# Altium PCB 388D_Control_v1_PCB1_jiin.PcbDoc (part 3 of 3)
Units mil, origin at the board's own origin, x right, y up, seen from the top; angles counter-clockwise.
Board outline 4500 x 3200 mil, 6 copper layers (Top Layer, Singal Layer 2, Signal layer 3, Signal Layer 4, Signal Layer 5, Bottom Layer), stack 32.7 mil thick; 386 components, 377 nets, 1672 pads, 15 vias.
Unrouted connection lines stored in the file: 1151.
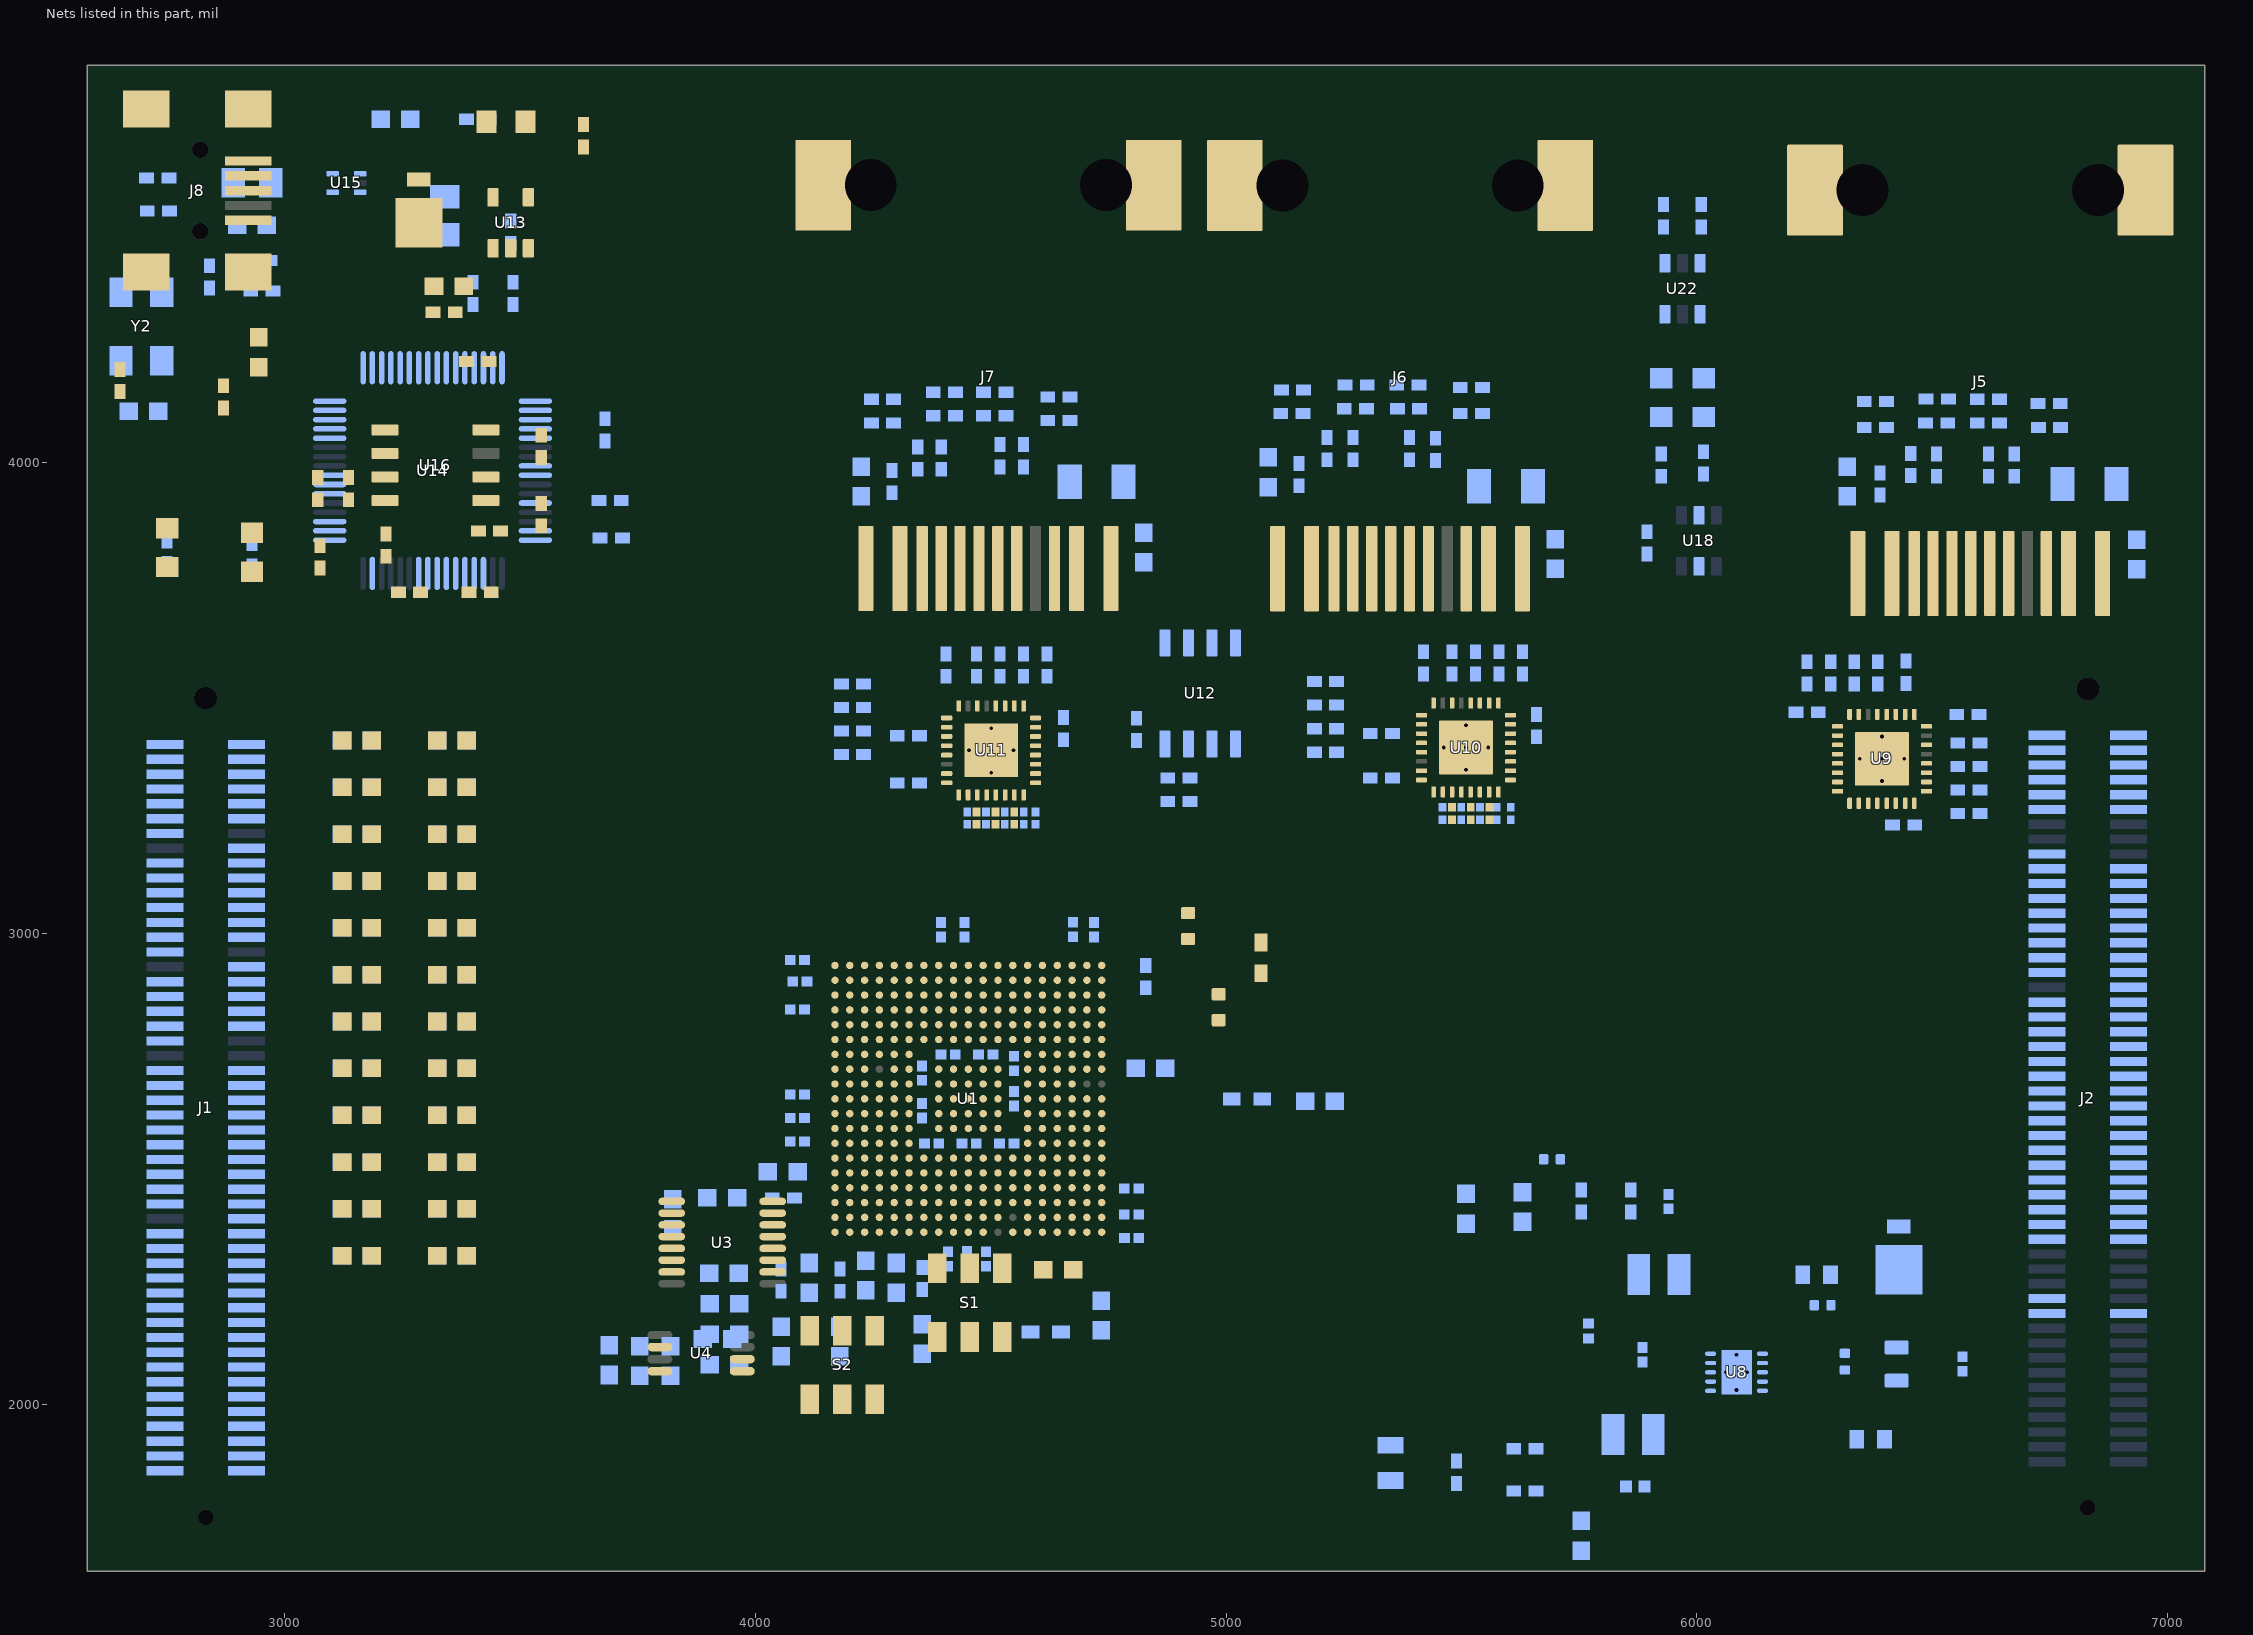
[diagram p2: the nets of this part, all layers, seen from the top]

## Part data (continued)
R154: library part CMP-0026834-3, "RES, 12 k, 5%, 0.063 W, AEC-Q200 Grade 0, 0402", Manufacturer=Vishay-Dale, Power_W=63mW, Supplier Part Number 1=541-12KJCT-ND, TempCo="200 ppm/C", Tolerance_%=5%, Value2=0.063W, Value_Code=12k0, ValueDisplayed=12k, AEC Category=Q200, AEC Grade=0, AEC Qualified=Y, ComponentLink1Description="Datasheet link", ComponentLink1URL=http://www.vishay.com/docs/20035/dcrcwe3.pdf, CompType=Resistor, EIA_Code=E24, MountType=SMT, PackageReference=0402, PartNumber=CRCW040212K0JNED, Res_ohm=12k, RoHS=E, SizeArea_mm2=0.5, SizeX_mm=1, SizeY_mm=0.5, SizeZ_mm=0.6, Supplier 1=Digi-Key, Supplier 2=Newark, Supplier 3=Mouser, Supplier Part Number 2=89M6603, Supplier Part Number 3=71-CRCW040212K0JNED, Technology="Thick Film", Value1=5%, VDC_V=50V
S1 S2: library part CMP-0002233-1, "Switch, Dual SPDT,  2 Pos, 0.1A, 6VDC, SMD", CurrentRating_mA=100A, Manufacturer="Copal Electronics", Supplier Part Number 1=CASD20JCT-ND, Circuit=SPDT, ComponentLink1Description="Datasheet Link", ComponentLink1URL=http://www.nidec-copal-electronics.com/e/catalog/switch/cas.pdf, CompType=Switch, LatestRevisionDate=2017-03-09, MountType=SMT, Orientation="Top Actuated", PackageReference=5.4x3.9mm, PartNumber=CAS-D20TA, PositionCount=2, Publisher="Texas Instruments", RoHS=Y, Supplier 1=Digi-Key, SwitchFunction=On-On, VDC_V=6V
S3: library part CMP-0002193-2, "Switch, SPST-NO, Off-Mom, 12 V, SMD", CurrentRating_mA=50A, Manufacturer="Omron Electronic Components", Supplier Part Number 1=SW1021CT-ND, Circuit=SPST-NO, ComponentLink1Description="Datasheet URL", ComponentLink1URL=http://www.omron.com/ecb/products/pdf/en-b3u.pdf, CompType=Switch, LatestRevisionDate=2017-03-09, MountType=SMT, Orientation="Top Actuated", PackageReference="SMD, 3-Leads, Body 3x2.5mm", PartNumber=B3U-1100P, PositionCount=1, Publisher="Texas Instruments", RoHS=Y, Supplier 1=Digi-Key, Supplier 2=Newark, Supplier 3=Mouser, Supplier Part Number 2=39M4619, Supplier Part Number 3=653-B3U-1100P, SwitchFunction=Off-Mom, VDC_V=12V
S4 S5: library part CMP-0002230-1, "Switch, SPST, 2 Pos, 25mA, 24VDC, SMD", CurrentRating_mA=25A, Manufacturer="CTS Electrocomponents", Supplier Part Number 1=CT2182LPST-ND, Circuit=SPST, ComponentLink1Description="Datasheet Link", ComponentLink1URL=http://www.ctscorp.com/components/Datasheets/218.pdf, CompType=Switch, LatestRevisionDate=2017-03-09, MountType=SMT, Orientation="Top Actuated", PackageReference=3.71x5.8mm, PartNumber=218-2LPST, PositionCount=2, Publisher="Texas Instruments", RoHS=Y, Supplier 1=Digi-Key, Supplier 2=Mouser, Supplier Part Number 2=774-2182LPST, SwitchFunction=Off-On, VDC_V=24V
TP1 TP2 TP3 TP4: library part CMP-002-00037-2, "Test Point, Orange, Height 4.6 mm, Tail Length 3 mm, 1-Pin THD, RoHS", Colour=Orange, Manufacturer=Keystone, Package Description="1-Pin Through Hole Device, Dia 2.54 mm", Package Quantity=10, Case/Package=5003, Connector Type=TestPoint, Contact Material=Bronze, Contact Plating=Tin, Datasheet URL=http://keyelco.com/userAssets/file/M65p56.pdf, Datasheet Version=Jun-15, Diameter=2.54mm, Manufacturer URL=http://www.keyelco.com/, Mounting Technology=TH, Package Reference=5003, Packaging=Bulk, Pins=1, RoHS Compliant=True
TP5 TP6 TP7 TP8 TP9 TP10 TP11 TP12 TP13: library part CMP-0078143-3, "TEST POINT.  No entry in BOM.", Manufacturer=N/A, CompType=Testpoint, PackageReference=N/A, PartNumber=N/A
U1: library part CMP-012-000147-1, "TMS320F28388DZWTS, ZWT0337A (NFBGA-337)", Alternate Manufacturer="Texas Instruments", AEC Category=Q200, AEC Qualified=N, Available Preview Images=2D, ComponentLink1Description="Datasheet Link", ComponentLink1URL=http://www.ti.com/lit/ds/symlink/tms320f28388d.pdf, ComponentLink2Description="Product Folder", ComponentLink2URL=http://www.ti.com/product/tms320f28388d, ComponentLink3Description="Online Datasheet", ComponentLink3URL=http://www.ti.com/product/tms320f28388d/datasheet, CompType=IC, Design Item ID=TMS320F28388DZWTS, Manufacturer="Texas Instruments", MountType=SMT, PackageDescription=NFBGA-337, PackageReference=ZWT0337A, PartNumber=TMS320F28388DZWTS, SizeArea_mm2=256, SizeAreaWB_mm2=324, SizeX_mm=16, SizeY_mm=16, SizeZ_mm=1.4, Source=SamacSys.SchLib
U2: library part CMP-0051789-2, "Dual Buffer/Driver with Open-Drain Output, DBV0006A, LARGE T&R", F @ Nom Voltage(Max)(Mhz)=150, Generic Part Number=SN74LVC2G07, ICC @ Nom Voltage(Max)(mA)=0.01, Manufacturer="Texas Instruments", Operating Temperature Range(C)="-40 to 125", Rating=Catalog, tpd @ Nom Voltage(Max)(ns)=8.6,4.4,3.7,2.9, Voltage(Nom)(V)=1.8,2.5,3.3,5, 3-State Output=No, AEC Category=Q200, AEC Qualified=N, Bits(#)=2, ComponentLink1Description="Datasheet Link", ComponentLink1URL=http://www.ti.com/lit/ds/symlink/sn74lvc2g07.pdf, ComponentLink2Description="Product Folder", ComponentLink2URL=http://www.ti.com/product/sn74lvc2g07, ComponentLink3Description="Online Datasheet", ComponentLink3URL=http://www.ti.com/product/sn74lvc2g07/datasheet, CompType=IC, DatasheetVersion=SCES308K, Green_EU RoHS=Passed, Green_EU RoHS-2=Passed, Green_Lifecycle=Active, Green_REACh=Passed, Input Type=CMOS/TTL, Logic=True, MountType=SMT, Output Drive (IOL/IOH)(Max)(mA)=32/-32, Output Type=CMOS, PackageDescription=SOT-23-6, PackageReference=DBV0006A, PartNumber=SN74LVC2G07DBVR, RoHS=Y, Schmitt Trigger=No, SizeArea_mm2=8.12, SizeAreaWB_mm2=14.82, SizeX_mm=2.8, SizeY_mm=2.9, SizeZ_mm=1.45, Sub-Family="Inverting Buffer/Driver", Technology Family=LVC, VCC(Max)(V)=5.5, VCC(Min)(V)=1.65
U3: library part CMP-014-00004-2, "High-Speed, Single-Supply, Rail-to-Rail Operational Amplifier MicroAmplifier(TM) Series, 2.7 to 5.5 V, -55 to 150 degC, 16-pin SOP (DBQ16), Green (RoHS & no Sb/Br)", Case/Package="16-Pin, Plastic Small Outline, Body 3.9 x 4.9 mm, Pitch 0.635 mm", Manufacturer="Texas Instruments", Total Supply Voltage(Max)(+5V is 5, +/-5V is 10)=5.5, Total Supply Voltage(Min)(+5V is 5, +/-5V is 10)=2.7, Available Preview Images=2D, CMRR(Min)(dB)=66, Code_JEDEC=MO-137, ComponentLink1Description="Manufacturer URL", ComponentLink1URL=http://www.ti.com/, ComponentLink2Description=Datasheet, ComponentLink2URL=http://www.ti.com/general/docs/lit/getliterature.tsp?genericPartNumber=OPA4350&fileType=pdf, ComponentLink3Description="Package Specification", ComponentLink3URL=http://www.ti.com/litv/pdf/msoi004g, DatasheetVersion=SBOS099C, Design Item ID=CMP-0041147-1, Eco-Plan="Green (RoHS & no Sb/Br)", IIB(Max)(pA)=10, Iq per channel(Max)(mA)=7.5, Mounting Technology="Surface Mount", Number of Channels=4, Offset Drift(Typ)(uV/C)=4, PackageReference=DBQ0016A, PackageVersion="4073301-2/H, 10/2008", Slew Rate(Typ)(V/us)=22, Source=SamacSys.SchLib, Sub Family="Low Input Bias Current Amp (<=10pA), Low Offset Voltage Amplifier (<=500uV), Low Supply Voltage Amplifier (<=2.7V), Precision Amplifier", Vio (25C)(Max)(mV)=0.5, Vn at 1kHz(Typ)(nV/rtHz)=18
U4: library part CMP-0032596-2, "Low Noise, Very Low Drift, Precision Series Voltage Reference, DGK0008A (VSSOP-8)", Manufacturer="Texas Instruments", Rating=Catalog, Temp Coeff(Max)(ppm/ degree C)=3, AEC Category=Q200, AEC Qualified=N, Code_JEDEC=MO-187-AA, ComponentLink1Description="Datasheet Link", ComponentLink1URL=http://www.ti.com/lit/ds/symlink/ref5030.pdf, ComponentLink2Description="Product Folder", ComponentLink2URL=http://www.ti.com/product/ref5030, ComponentLink3Description="Online Datasheet", ComponentLink3URL=http://www.ti.com/product/ref5030/datasheet, CompType=IC, DatasheetVersion=SBOS410E, Eco-Plan="Green (RoHS & no Sb/Br)", Initial Accuracy @ 25/deg C(%)=0.05, Iout/Iz(Max)(mA)=10, Iq(Max)(uA)=1000, MountType=SMT, PackageDescription=VSSOP-8, PackageReference=DGK0008A, PackageVersion=4073329/E, PartNumber=REF5030IDGKT, RoHS=Y, SizeArea_mm2=14.7, SizeAreaWB_mm2=23.6, SizeX_mm=4.9, SizeY_mm=3, SizeZ_mm=1.1, SubFamily="Series Voltage Reference", VI(Max)(V)=18, VI(Min)(V)=3.2, VO(V)=3
U5: library part CMP-052-000006-1, "Low Jitter, 1:4 LVCMOS Fan-out Clock Buffer, PW0008A (TSSOP-8)", Alternate Manufacturer="Texas Instruments", Available Preview Images=2D, ComponentLink1Description="Datasheet Link", ComponentLink1URL=http://www.ti.com/lit/ds/symlink/cdclvc1104.pdf, CompType=IC, Design Item ID=CDCLVC1104PW, Green_EU RoHS=Passed, Green_EU RoHS-2=Passed, Green_Lifecycle=Active, Green_REACh=Passed, LatestRevisionDate=2017-06-09, Manufacturer="Texas Instruments", MountType=SMT, PackageDescription=TSSOP-8, PackageReference=PW0008A, PartNumber=CDCLVC1104PW, Publisher="Texas Instruments", RoHS=Y, SizeArea_mm2=19.2, SizeAreaWB_mm2=42.0, SizeX_mm=6.4, SizeY_mm=3.0, SizeZ_mm=1.2, Source=MCU063B.SCHLIB, U/M=EA
U6 U7: library part CMP-052-000005-1, "High-Accuracy, Fixed-Threshold OV/UV Monitor, DDC0006A (SOT-23-T-6)", Alternate Manufacturer="Texas Instruments", Alternate PartNumber=TPS3702CX33DDCR, AEC Category=Q200, AEC Qualified=N, Available Preview Images=2D, ComponentLink1Description="Datasheet Link", ComponentLink1URL=http://www.ti.com/lit/ds/symlink/tps3702.pdf, ComponentLink2Description="Product Folder", ComponentLink2URL=http://www.ti.com/product/tps3702, ComponentLink3Description="Online Datasheet", ComponentLink3URL=http://www.ti.com/product/tps3702/datasheet, CompType=IC, Design Item ID=TPS3702CX33DDCT, Manufacturer="Texas Instruments", MountType=SMT, PackageDescription=SOT-23-T-6, PackageReference=DDC0006A, PartNumber=TPS3702CX33DDCT, RoHS=Y, SizeArea_mm2=4.8675, SizeAreaWB_mm2=10.4675, SizeX_mm=1.65, SizeY_mm=2.95, SizeZ_mm=0.87, Source=MCU063B.SCHLIB
U8: library part CMP-014-000012-1, "Dual, Adjustable, 600mA and 1000mA, 2.25MHz Step-Down Converter with 1-Wire Interface in QFN 10-VSON -40 to 85", Alternate_PartNumber=TPS62420DRCT, Manufacturer="Texas Instruments", CompType=IC, Copyright="Copyright (C) 2025 Ultra Librarian. All rights reserved.", Design Item ID=TPS62420DRCR, Manufacturer_Name="Texas Instruments", Manufacturer_Part_Number=TPS62420DRCR, MountType=SMT, PackageReference=DRC0010J, PartNumber=TPS62420DRCR, RefDes=RefDes, RoHS=Y, Source=SamacSys.SchLib, Type=TYPE
U9 U10 U11: library part CMP-0076010-4, "Robust, Low Power 10/100 Ethernet Physical Layer Transceiver, RHB0032B (VQFN-32)", Alternate Manufacturer="Texas Instruments", Alternate PartNumber=DP83822IRHBT, AEC Category=Q200, AEC Qualified=N, ComponentLink1Description="Datasheet Link", ComponentLink1URL=http://www.ti.com/lit/ds/symlink/dp83822i.pdf, ComponentLink2Description=ComponentLink2Description, ComponentLink2URL=http://www.ti.com/product/dp83822i, ComponentLink3Description="Online Datasheet", ComponentLink3URL=http://www.ti.com/product/GPN/datasheet, CompType=IC, Manufacturer="Texas Instruments", MountType=SMT, PackageDescription=VQFN-32, PackageReference=RHB0032B, PartNumber=DP83822IRHBR, RoHS=Y, SizeArea_mm2=25.0, SizeAreaWB_mm2=49.0, SizeX_mm=5.0, SizeY_mm=5.0, SizeZ_mm=1.0
U12: library part CMP-0082059-1, "16 Kb I2C EEPROM Serial, SOIC-8", Manufacturer="ON Semiconductor", Supplier Part Number 1=CAT24C16WI-GT3CT-ND, ComponentLink1Description="Datasheet URL", ComponentLink1URL=https://www.onsemi.com/pub/Collateral/CAT24C01-D.PDF, MountType=SMT, PackageReference=SOIC-8, PartNumber=CAT24C16WI-GT3, RoHS=Y, SizeArea_mm2=29.351, SizeAreaWB_mm2=55.131, SizeX_mm=5.99, SizeY_mm=4.9, SizeZ_mm=1.75, Supplier 1=Digi-Key, Supplier 2=Newark, Supplier 3=Mouser, Supplier Part Number 2=23AC2979, Supplier Part Number 3=698-CAT24C16WI-GT3
U13: library part CMP-0073823-1, "Low-Noise, High PSRR, RF 200-mA Low-Dropout Linear Regulators, DBV0005A (SOT-23-5)", Alternate Manufacturer="Texas Instruments", Alternate PartNumber=TPS73033DBVT, ComponentLink1Description="Datasheet Link", ComponentLink1URL=http://www.ti.com/lit/ds/symlink/tps730.pdf, CompType=IC, Footprint Path 6=C:\AltiumLibraries\Footprints\TI\.PcbLib, Green_EU RoHS=Passed, Green_EU RoHS-2=Passed, Green_Lifecycle=Active, Green_REACh=Passed, LatestRevisionDate=2017-06-09, Manufacturer="Texas Instruments", MountType=SMT, PackageDescription=SOT-23-5, PackageReference=DBV0005A, PartNumber=TPS73033DBVR, Publisher="Texas Instruments", RoHS=Y, SizeArea_mm2=8.12, SizeAreaWB_mm2=14.82, SizeX_mm=2.8, SizeY_mm=2.9, SizeZ_mm=1.45, U/M=EA
U14: library part CMP-0004796-1, "Dual High Speed USB To Multipurpose UART/FIFO IC, LQFP-64", Manufacturer=FTDI, Supplier Part Number 1=768-1024-1-ND, ComponentLink1Description="Datasheet URL", ComponentLink1URL=http://www.ftdichip.com/Support/Documents/DataSheets/ICs/DS_FT2232H.pdf, LatestRevisionDate=09/03/2017, MountType=SMT, PackageReference=LQFP_10x10mm, PartNumber=FT2232HL-REEL, Publisher="Texas Instruments", RoHS=Y, Supplier 1=Digi-Key, Supplier 2=Mouser, Supplier Part Number 2=895-FT2232HL
U15: library part CMP-0043096-2, "Low-Capacitance + / - 15 kV ESD-Protection Array for High-Speed Data Interfaces, 2 Channels, -40 to +85 degC, 5-pin SOT (DRL), Green (RoHS & no Sb/Br)", Breakdown Voltage(Min)(V)=11, IO Capacitance(Typ)(pF)=1.5, IO Leakage Current(nA)=1, Manufacturer="Texas Instruments", ComponentLink1Description="Manufacturer URL", ComponentLink1URL=http://www.ti.com/, ComponentLink2Description=Datasheet, ComponentLink2URL=http://www.ti.com/general/docs/lit/getliterature.tsp?genericPartNumber=TPD2E001&fileType=pdf, ComponentLink3Description="URL Link1", ComponentLink3URL=SamplesURL:http://www.ti.com/product/tpd2e001#samples, DatasheetVersion=SLLS684F, Eco-Plan="Green (RoHS & no Sb/Br)", IEC 61000-4-2 Air-Gap(+/- kV)=15, IEC 61000-4-2 Contact(+/- kV)=8, Mounting Technology="Surface Mount", PackageDescription="5-Pin Plastic Small Outline, Flat Lead 0.5 mm Pitch", PackageReference=DRL0005A, PackageVersion="revD, Aug-2007", PartNumber=TPD2E001DRLR, SubFamily="ESD Solution", USB High Speed=TRUE
U16: library part CMP-0005261-2, "2K Microwire Compatible Serial EEPROM, SOIC-8", Manufacturer=Microchip, Supplier Part Number 1=93LC56C-I/SN-ND, ComponentLink1Description="Datasheet URL", ComponentLink1URL=http://ww1.microchip.com/downloads/en/DeviceDoc/21794G.pdf, LatestRevisionDate=09/03/2017, MountType=SMT, PackageReference=SOIC-8, PartNumber=93LC56C-I/SN, Publisher="Texas Instruments", RoHS=Y, SizeArea_mm2=29.351, SizeAreaWB_mm2=55.131, SizeX_mm=5.99, SizeY_mm=4.9, SizeZ_mm=1.75, Supplier 1=Digi-Key, Supplier 2=Newark, Supplier 3=Mouser, Supplier Part Number 2=30H4775, Supplier Part Number 3=579-93LC56C-I/SNG
U17 U19 U20 U218: library part CMP-0029375-1, "25 Mbps Dual Channels, 2 / 0, Digital Isolator, 3.3 V / 5 V, -40 to +125 degC, 8-pin SOIC (D), Green (RoHS & no Sb/Br)", Insulation Rating(VRMS)=2500, Manufacturer="Texas Instruments", Rating=Catalog, Supply Voltage(s)(V)="3.3, 5", Channel Configuration=2/01/2000, ComponentLink1Description="Manufacturer URL", ComponentLink1URL=http://www.ti.com/, ComponentLink2Description=Datasheet, ComponentLink2URL=http://www.ti.com/general/docs/lit/getliterature.tsp?genericPartNumber=ISO7220C&fileType=pdf, ComponentLink3Description="URL Link1", ComponentLink3URL=SamplesURL:http://www.ti.com/product/iso7220c#samples, Datarate(Mbps)=25, DatasheetVersion=SLLS755L, Eco-Plan="Green (RoHS & no Sb/Br)", Input Noise Filter=Yes, Mounting Technology="Surface Mount", PackageDescription="8-Pin Plastic Small Outline Integrated Circuit, 4.9 x 3.9 mm, Pitch 1.27 mm Pitch", PackageReference=D0008B, PackageVersion="revM, Jun-2011", PartNumber=ISO7220CD, Prop Delay(Max)(ns)=42, SubFamily=Isolator, Thermal Shutdown=No, TTL/CMOS Input Threshold=TTL
U18 U22: library part CMP-0051777-2, "Dual Inverter Buffer/Driver with Open-Drain Output, DBV0006A, LARGE T&R", F @ Nom Voltage(Max)(Mhz)=150, Generic Part Number=SN74LVC2G06, ICC @ Nom Voltage(Max)(mA)=0.01, Manufacturer="Texas Instruments", Operating Temperature Range(C)="-40 to 125,-40 to 85", Rating=Catalog, tpd @ Nom Voltage(Max)(ns)=8.2,4.4,3.9,3.4, Voltage(Nom)(V)=1.8,2.5,3.3,5, 3-State Output=No, Bits(#)=2, DatasheetVersion=SCES307I, Input Type=CMOS/TTL, Logic=Inverting, Output Drive (IOL/IOH)(Max)(mA)=32/-32, Output Type=CMOS, PackageReference=DBV0006A, PartNumber=SN74LVC2G06DBVR, Schmitt Trigger=No, Sub-Family="Inverting Buffer/Driver", Technology Family=LVC, VCC(Max)(V)=5.5, VCC(Min)(V)=1.65
U21: library part CMP-0047070-3, "Octal Buffer/Driver With 3-State OUtputs, PW0020A (TSSOP-20)", Alternate Manufacturer="Texas Instruments", Alternate PartNumber=SN74ALVC244PW, F @ Nom Voltage(Max)(Mhz)=100, Generic Part Number=SN74ALVC244, ICC @ Nom Voltage(Max)(mA)=0.024, Operating Temperature Range(C)="-40 to 85", Rating=Catalog, tpd @ Nom Voltage(Max)(ns)=4.4,3.1,2.8, Voltage(Nom)(V)=1.8,2.5,2.7,3.3, AEC Category=Q200, AEC Qualified=N, Bits(#)=8, Code_JEDEC=MO-153, ComponentLink1Description="Datasheet Link", ComponentLink1URL=http://www.ti.com/lit/ds/symlink/sn74alvc244.pdf, ComponentLink2Description="Product Folder", ComponentLink2URL=http://www.ti.com/product/sn74alvc244, ComponentLink3Description="Online Datasheet", ComponentLink3URL=http://www.ti.com/product/sn74alvc244/datasheet, CompType=IC, DatasheetVersion=SCES188G, Input Type=LVTTL, Manufacturer="Texas Instruments", MountType=SMT, Output Type=LVTTL, PackageDescription=TSSOP-20, PackageReference=PW0020A, PackageVersion=http://www.ti.com/lit/ml/mpds362/mpds362.pdf, PartNumber=SN74ALVC244PWR, RoHS=Y, SizeArea_mm2=43.56, SizeAreaWB_mm2=73.96, SizeX_mm=6.6, SizeY_mm=6.6, SizeZ_mm=1.2, VCC(Max)(V)=3.6, VCC(Min)(V)=1.65
Y1: library part CMP-052-000000-1, "Oscillator, 25 MHz, 15 pF, SMD", Frequency Stability="10 ppm", Frequency_Fixed=25MHz, Load Capacitance=15pF, Manufacturer="ECS Inc.", PartNumber=ECS-2520S33-250-FN-TR, AEC Category=Q200, AEC Grade=N/A, AEC Qualified=N, Available Preview Images=2D, ComponentLink1Description="Datasheet Link", ComponentLink1URL=https://www.ecsxtal.com/store/pdf/ECS-2520S.pdf, CompType=Oscillator, Design Item ID=CMP-0082061-2, MountType=SMT, PackageReference=2x2.5mm, RoHS=Y, SizeArea_mm2=5, SizeAreaWB_mm2=10.5, SizeX_mm=2, SizeY_mm=2.5, SizeZ_mm=1, Source=MCU063B.SCHLIB, TaMax_C=85°C, TaMin_C=-40°C
Y2: library part CMP-0004646-3, "Crystal, 12 MHz, 20pF, SMD", Frequency Stability=+/-50ppm, Frequency_Fixed=12MHz, Manufacturer="ECS Inc.", Supplier Part Number 1=XC1118CT-ND, ComponentLink1Description="Datasheet Link", ComponentLink1URL=http://www.ecsxtal.com/store/pdf/ecx_53b.pdf, CompType=Crystal, MountType=SMT, PackageReference=5x3.2mm, PartNumber=ECS-120-20-30B-TR, RoHS=Y, Supplier 1=Digi-Key, Supplier 2=Mouser, Supplier Part Number 2=520-ECS-120-20-30B, TaMax_C=70°C, TaMin_C=-20°C

## Via types
v1: diameter 19.68, hole 7.87, Top Layer to Bottom Layer, tented both sides, 15 vias

## Nets (pads, with @x,y where several pads share a name; then routed paths per layer and width w, separated by ;. In a path a pad name is that pad's centre, name@x,y a point inside that pad or via, vN(x,y) a via of type N, cw(c..) or ccw(c..) an arc to the next point about the centre after c; other vN are vias at no path point)
1V2: C36.1 C37.1 C71.2 D2.2 L2.2 L5.1 R50.2
3V3: C35.1 C42.1 C53.1 D2.1 J2.19 J3.10 L1.2 L3.1 L4.1 R44.2 R47.2 R48.2
25MHZ_CLK: U5.1 Y1.3
1415_N: C4.1 R18.1 U1.U4
1415_P: C16.1 R17.1 U1.T4
A0A1_N: C1.1 R11.1 U1.T1
A0A1_P: C13.1 R10.1 U1.U1
A2A3_N: C2.1 R13.1 U1.T2
A2A3_P: C14.1 R12.1 U1.U2
A4A5_N: C3.1 R15.1 U1.T3
A4A5_P: C15.1 R14.1 U1.U3
ADC_3V0_REF: R42.2 U4.6
ADC_A0A1_N: J1.11 R11.2
ADC_A0A1_P: J1.9 R10.2
ADC_A2A3_N: J1.17 R13.2
ADC_A2A3_P: J1.15 R12.2
ADC_A4A5_N: J1.23 R15.2
ADC_A4A5_P: J1.21 R14.2
ADC_B0B1_N: J1.14 R20.2
ADC_B0B1_P: J1.12 R19.2
ADC_B2B3_N: J1.20 R22.2
ADC_B2B3_P: J1.18 R21.2
ADC_B4B5_N: J1.26 R24.2
ADC_B4B5_P: J1.24 R23.2
ADC_C2C3_N: J1.33 R27.2
ADC_C2C3_P: J1.31 R26.2
ADC_C4C5_N: J1.39 R29.2
ADC_C4C5_P: J1.37 R28.2
ADC_D0D1_N: J1.30 R32.2
ADC_D0D1_P: J1.28 R31.2
ADC_D2D3_N: J1.36 R34.2
ADC_D2D3_P: J1.34 R33.2
ADC_D4D5_N: J1.42 R36.2
ADC_D4D5_P: J1.40 R35.2
ADC_IN1415_N: J1.27 R18.2
ADC_IN1415_P: J1.25 R17.2
ADC_REF: C33.1 R43.2 U3.2 U3.5 U3.11 U3.14
B0B1_N: C5.1 R20.1 U1.W2
B0B1_P: C17.1 R19.1 U1.V2
B2B3_N: C6.1 R22.1 U1.W3
B2B3_P: C18.1 R21.1 U1.V3
B4B5_N: C7.1 R24.1 U1.W4
B4B5_P: C19.1 R23.1 U1.V4
C2C3_N: C8.1 R27.1 U1.P3
C2C3_P: C20.1 R26.1 U1.R3
C4C5_N: C9.1 R29.1 U1.P4
C4C5_P: C21.1 R28.1 U1.R4
D0D1_N: C10.1 R32.1 U1.U5
D0D1_P: C22.1 R31.1 U1.T5
D2D3_N: C11.1 R34.1 U1.U6
D2D3_P: C23.1 R33.1 U1.T6
D4D5_N: C12.1 R36.1 U1.U7
D4D5_P: C24.1 R35.1 U1.T7
EMU0: J1.2 R2.2
EMU1: J1.1 R1.1
EMU_1V8: C136.2 C137.2 C138.2 C139.2 U14.12 U14.37 U14.49 U14.64
EMU_3V3: C133.1 C140.2 C141.2 C142.2 C143.2 C151.2 C154.2 C156.2 C158.2 L6.2 L7.2 R142.1 R143.2 R145.2 R149.1 R151.1 TP12.1 U13.5 U14.20 U14.31 U14.42 U14.50 U14.56 U16.6 U16.8 U17.1 U19.8 U20.1 U218.1
EMU_5V0: C132.2 C134.1 D7.1 D9.2 D10.2 TP11.1 U13.1 U13.3 U15.1
EMU_GND: C132.1 C133.2 C134.2 C135.1 C136.1 C137.1 C138.1 C139.1 C140.1 C141.1 C142.1 C143.1 C144.2 C145.1 C146.2 C147.1 C148.1 C149.1 C150.1 C151.1 C154.1 C156.1 C158.1 C160.2 D8.1 J8.5 R146.2 R152.2 R153.1 R154.1 R155.1 TP13.1 U13.2 U14.1 U14.5 U14.10 U14.11 U14.13 U14.15 U14.25 U14.35 U14.47 U14.51 U15.4 U16.5 U17.4 U19.5 U20.3 U20.4 U218.4 Y2.2 Y2.4
EMU_SCI-RX: U14.38 U20.2
EMU_SCI-TX: U14.39 U19.6
EMU_TCK: R144.1 U14.16 U218.2
EMU_TDI: U14.17 U17.2
EMU_TDO: U14.18 U19.7
EMU_TMS: R143.1 U14.19 U218.3
EMU_TRSTn: U14.21 U17.3
EMU_USB_5V0: D7.2 J8.1
ENET_PHY_CLK: R77.2 U9.23
ERRORSTS: J2.78 R64.2 TP5.1 U1.U19
F2838x_25MHZ_CLK: R83.2 R85.2
F2838x_CLK: R63.2 R85.1 TP10.1 U1.G19
HSEC_ADC-VREFHI: J1.45 R41.1
HSEC_GPIO8: J1.57 R56.2
HSEC_GPIO9: J1.59 R58.2
HSEC_GPIO10: J1.61 R57.1
HSEC_GPIO25: J1.77 R60.1
HSEC_GPIO26: J1.79 R61.2
HSEC_GPIO27: J1.81 R65.2
IN_5V0: C38.2 C39.2 D1.1 R45.2 R46.2 R51.2 U8.3
MCU_GPIO0: J1.49 U1.C8
MCU_GPIO1: J1.51 U1.D8
MCU_GPIO2: J1.53 U1.A7
MCU_GPIO3: J1.55 U1.B7
MCU_GPIO4: C1.2 C2.2 C3.2 C4.2 C5.2 C6.2 C7.2 C8.2 C9.2 C10.2 C11.2 C12.2 C13.2 C14.2 C15.2 C16.2 C17.2 C18.2 C19.2 C20.2 C21.2 C22.2 C23.2 C24.2 C25.1 C26.2 C27.2 C28.2 C29.2 C30.2 C31.2 C32.2 C33.2 C34.2 C35.2 C37.2 C38.1 C39.1 C40.1 C41.1 C42.2 C43.2 C44.1 C45.1 C46.1 C47.1 C48.1 C49.1 C50.1 C51.1 C52.1 C53.2 C54.2 C55.1 C56.1 C57.1 C58.1 C59.1 C60.1 C61.1 C62.1 C63.1 C64.1 C65.1 C66.1 C67.1 C68.1 C69.1 C70.1 C71.1 C72.1 C73.2 C74.2 C75.2 C76.2 C77.2 C78.2 C79.2 C80.2 C81.2 C82.2 C83.2 C84.2 C85.2 C86.2 C87.2 C88.2 C89.1 C90.1 C91.1 C92.1 C93.2 C94.2 C95.1 C96.2 C97.2 C98.2 C99.2 C100.2 C101.2 C102.2 C103.2 C104.2 C105.2 C106.1 C107.1 C108.2 C109.1 C110.1 C111.2 C112.2 C113.1 C114.2 C115.2 C116.2 C117.2 C118.2 C119.2 C120.2 C121.2 C122.2 C123.2 C124.1 C125.1 C126.2 C127.1 C128.1 C129.2 C130.2 C131.1 C152.2 C153.1 C155.2 C157.2 C159.2 C160.1 D1.2 J1.7 J1.10 J1.19 J1.22 J1.35 J1.38 J1.46 J1.47 J1.48 J1.50 J1.65 J1.83 J1.84 J1.86 J1.97 J1.98 J1.100 J2.11 J2.12 J2.35 J2.57 J2.58 J2.79 J2.80 J3.4 J3.8 LED1.1 R52.1 R53.1 R54.1 R55.1 R62.1 R63.1 R64.1 R70.1 R79.2 R80.1 R82.2 R86.2 R89.2 R104.2 R111.1 R112.1 R113.1 R114.1 R115.1 R116.1 R123.2 R124.2 R128.2 R135.1 R136.1 R137.1 R138.1 R139.1 S3.2 S3.3 S5.1 TP1.1 TP4.1 U1.A1 U1.A10 U1.A19 U1.C7 U1.E5 U1.E6 U1.E8 U1.E12 U1.E14 U1.E15 U1.F5 U1.F6 U1.F8 U1.F12 U1.F14 U1.F15 U1.G16 U1.G17 U1.H8 U1.H9 U1.H10 U1.H11 U1.H12 U1.H14 U1.H15 U1.H18 U1.H19 U1.J5 U1.J6 U1.J8 U1.J9 U1.J10 U1.J11 U1.J12 U1.K8 U1.K9 U1.K10 U1.K11 U1.K12 U1.K14 U1.K15 U1.L5 U1.L6 U1.L8 U1.L9 U1.L10 U1.L11 U1.L12 U1.L18 U1.M8 U1.M9 U1.M10 U1.M11 U1.M12 U1.M14 U1.M15 U1.N1 U1.N5 U1.N6 U1.P1 U1.P2 U1.P5 U1.P7 U1.P8 U1.P11 U1.P12 U1.P14 U1.P15 U1.P18 U1.R2 U1.R5 U1.R7 U1.R8 U1.R14 U1.R15 U1.U14 U1.V6 U1.V7 U1.W1 U1.W6 U1.W7 U1.W19 U2.2 U2.3 U3.13 U4.4 U5.4 U6.2 U7.2 U8.8 U8.11 U9.33@6393.94,3371.06 U10.33@5510,3395 U11.33@4501.06,3388.94 U12.1 U12.2 U12.3 U12.4 U12.7 U17.5 U18.2 U19.4 U20.5 U21.10 U21.13 U21.15 U21.17 U218.5 Y1.2
  other v1: 6393.94,3323.82 4501.06,3341.69 5510,3347.76 6346.69,3371.06 6393.94,3371.06 6441.18,3371.06 4453.82,3388.94 4501.06,3388.94 4548.31,3388.94 5462.76,3395 5510,3395 5557.24,3395 6393.94,3418.31 4501.06,3436.18 5510,3442.24
MCU_GPIO5: J1.52 U1.D7
MCU_GPIO6: J1.54 U1.A6
MCU_GPIO7: J1.56 U1.B6
MCU_GPIO8: J3.1 R56.1 U1.G2
MCU_GPIO9: J3.3 R58.1 U1.G3
MCU_GPIO10: J3.2 R57.2 U1.B2
MCU_GPIO11: J1.63 U1.C1
MCU_GPIO12: J1.58 U1.C2
MCU_GPIO13: J1.60 U1.D1
MCU_GPIO14: J1.62 U1.D2
MCU_GPIO15: J1.64 U1.D3
MCU_GPIO16: J1.67 U1.E1
MCU_GPIO17: J1.69 U1.E2
MCU_GPIO18: J1.71 U1.E3
MCU_GPIO19: J1.73 U1.E4
MCU_GPIO20: J1.68 U1.F2
MCU_GPIO21: J1.70 U1.F3
MCU_GPIO22: J1.72 U1.J4
MCU_GPIO23: J1.74 U1.K4
MCU_GPIO24: J1.75 U1.K3
MCU_GPIO25: J3.6 R60.2 U1.K2
MCU_GPIO26: J3.5 R61.1 U1.K1
MCU_GPIO27: J3.7 R65.1 U1.L1
MCU_GPIO28: J1.76 S5.3 U1.V11
MCU_GPIO29: J1.78 U1.W11 U19.3
MCU_GPIO30: J1.80 U1.T11
MCU_GPIO31: J1.82 R69.1 U1.U11 U2.1
MCU_GPIO32: J1.85 U1.U13
MCU_GPIO33: J1.87 U1.T13
MCU_GPIO35: J2.21 U1.T14
MCU_GPIO36: J2.22 U1.V16
MCU_GPIO37: J2.23 U1.U16
MCU_GPIO38: J2.24 U1.T16
MCU_GPIO39: J1.88 U1.W17
MCU_GPIO40: J1.89 U1.V17
MCU_GPIO41: J1.91 U1.U17
MCU_GPIO42: U1.D19
MCU_GPIO43: U1.C19
MCU_GPIO44: U1.K18 U9.2
MCU_GPIO45: J1.92 U1.K19
MCU_GPIO46: U1.E19
MCU_GPIO47: U1.E18
MCU_GPIO48: J1.99 U1.R16
MCU_GPIO49: J2.1 U1.R17
MCU_GPIO50: J2.3 U1.R18
MCU_GPIO51: J2.5 U1.R19
MCU_GPIO52: J2.7 U1.P16
MCU_GPIO53: J2.9 U1.P17
MCU_GPIO55: J2.2 U1.P19
MCU_GPIO56: J2.4 U1.N16
MCU_GPIO57: J2.6 U1.N18
MCU_GPIO58: J2.8 U1.N17
MCU_GPIO59: J2.10 R3.1
MCU_GPIO60: J2.25 U1.M17
MCU_GPIO61: J2.26 R4.1
MCU_GPIO62: J2.27 U1.J17
MCU_GPIO63: J2.28 U1.J16
MCU_GPIO64: J2.29 R5.1
MCU_GPIO65: J2.30 U1.K16
MCU_GPIO66: J2.31 R6.1
MCU_GPIO67: J2.32 U1.B19
MCU_GPIO68: J2.33 U1.C18
MCU_GPIO69: J2.34 U1.B18
MCU_GPIO70: J2.37 R7.1
MCU_GPIO71: J2.38 U1.B17
MCU_GPIO72: J2.39 R8.1 R74.2 S4.2
MCU_GPIO73: J2.40 U1.A16
MCU_GPIO74: J2.41 U1.C17
MCU_GPIO75: U1.D16 U9.4
MCU_GPIO76: J2.43 U1.C16
MCU_GPIO77: J2.44 U1.A15
MCU_GPIO78: J2.45 U1.B15
MCU_GPIO79: J2.46 U1.C15
MCU_GPIO80: J2.47 U1.D15
MCU_GPIO81: J2.48 U1.A14
MCU_GPIO82: J2.49 U1.B14
MCU_GPIO83: J2.50 U1.C14
MCU_GPIO84: J2.51 R75.1 S4.1 U1.A11
MCU_GPIO85: J2.52 U1.B11
MCU_GPIO86: J2.53 U1.C11
MCU_GPIO87: J2.54 U1.D11
MCU_GPIO88: J2.55 U1.C6
MCU_GPIO89: J2.56 U1.D6
MCU_GPIO90: J2.59 U1.A5
MCU_GPIO91: J2.60 U1.B5
MCU_GPIO92: J2.61 U1.A4
MCU_GPIO93: J2.62 U1.B4
MCU_GPIO94: J2.63 U1.A3
MCU_GPIO95: J2.68 U1.B3
MCU_GPIO96: J1.93 U1.C3
MCU_GPIO97: J1.94 U1.A2
MCU_GPIO98: J1.95 U1.F1
MCU_GPIO99: J1.96 U1.G1
MCU_GPIO100: U1.H1
MCU_GPIO101: U1.H2
MCU_GPIO102: U1.H3
MCU_GPIO103: U1.J1
MCU_GPIO104: J2.69 U1.J2
MCU_GPIO105: U1.J3 U9.20
MCU_GPIO106: R92.2 U1.L2 U9.19
MCU_GPIO107: J2.70 R72.2 U1.L3
MCU_GPIO108: R93.1 U1.L4 U9.8
MCU_GPIO109: U1.N2 U9.27
MCU_GPIO110: U1.M2 U9.29
MCU_GPIO111: U1.M4 U9.25
MCU_GPIO112: U1.M3 U9.26
MCU_GPIO113: U1.N4 U9.28
MCU_GPIO114: U1.N3 U9.30
MCU_GPIO115: U1.V12 U9.31
MCU_GPIO116: U1.W10 U9.32
MCU_GPIO117: U1.U12 U9.1
MCU_GPIO118: U1.T12 U9.3
MCU_GPIO119: U1.T15 U9.18
MCU_GPIO120: U1.U15
MCU_GPIO121: U1.W16
MCU_GPIO122: U1.T8 U9.5
MCU_GPIO123: U1.U8 U9.6
MCU_GPIO124: U1.V8 U9.7
MCU_GPIO125: J1.90 U1.T9
MCU_GPIO126: J2.42 U1.U9
MCU_GPIO127: J2.65 U1.V9
MCU_GPIO128: J2.66 U1.W9
MCU_GPIO129: U1.T10 U11.3
MCU_GPIO130: U1.U10 U11.2
MCU_GPIO131: U1.V10 U11.4
MCU_GPIO132: U1.W18 U11.5
MCU_GPIO133: J2.64 U1.G18
MCU_GPIO134: U1.V18 U11.6
MCU_GPIO135: U1.U18 U11.7
MCU_GPIO136: R135.2 U1.T17 U11.26
MCU_GPIO137: U1.T18 U11.25
MCU_GPIO138: R127.1 U1.T19 U11.28
MCU_GPIO139: R136.2 U1.N19 U11.30
MCU_GPIO140: R137.2 U1.M19 U11.31
MCU_GPIO141: R138.2 U1.M18 U11.32
MCU_GPIO142: R139.2 U1.L19 U11.1
MCU_GPIO143: J6.11 U1.F18
MCU_GPIO144: J7.11 U1.F17
MCU_GPIO145: R123.1 U1.E17 U22.1
MCU_GPIO146: R124.1 U1.D18 U22.3
MCU_GPIO147: J2.67 U1.D17
MCU_GPIO148: J6.2 R117.1 U1.D14 U10.17
MCU_GPIO149: J7.2 R140.1 U1.A13 U11.17
MCU_GPIO150: R100.1 U1.B13 U12.5
MCU_GPIO151: R101.1 U1.C13 U12.6
MCU_GPIO152: U1.D13 U10.20 U11.20
MCU_GPIO153: R107.2 R132.2 U1.A12 U10.19 U11.19
MCU_GPIO154: U1.B12
MCU_GPIO155: U1.C12 U10.18 U11.18
MCU_GPIO156: U1.D12 U10.3
MCU_GPIO157: U1.B10 U10.2
MCU_GPIO158: U1.C10 U10.4
MCU_GPIO159: U1.D10 U10.5
MCU_GPIO160: U1.B9 U10.6
MCU_GPIO161: U1.C9 U10.7
MCU_GPIO162: R111.2 U1.D9 U10.26
MCU_GPIO163: U1.A8 U10.25
MCU_GPIO164: R102.1 U1.B8 U10.28
MCU_GPIO165: R112.2 U1.C5 U10.30
MCU_GPIO166: R113.2 U1.D5 U10.31
MCU_GPIO167: R114.2 U1.C4 U10.32
MCU_GPIO168: R115.2 U1.D4 U10.1
MCU_TCK: J1.5 U1.V15 U21.14
MCU_TDI: J1.8 U1.W13 U21.18
MCU_TDO: J1.6 R59.1 U21.11
MCU_TMS: J1.3 U1.W14 U21.12
MCU_TRSTn: J1.4 R62.2 U1.V14 U21.16
MCU_XRSn: C74.1 J2.20 R68.1 S3.1 TP6.1 U1.F19 U6.1 U7.1
MID_SCI-RX: S5.2 U20.7
MID_TCK: U21.6 U218.7
MID_TDI: U17.7 U21.2
MID_TDO: U19.2 U21.9
MID_TMS: U21.8 U218.6
MID_TRSTn: U17.6 U21.4
NetC26_1: C26.1 R37.2
NetC27_1: C27.1 R38.2
NetC28_1: C28.1 R39.2
NetC29_1: C29.1 R40.2
NetC32_1: C32.1 R41.2 R42.1 R43.1
NetC34_1: C34.1 U4.5
NetC36_2: C36.2 R50.1 R53.2 U8.1
NetC40_2: C40.2 R45.1 U8.9
NetC41_2: C41.2 R46.1 U8.7
NetC76_1: C76.1 R71.1 R72.1 TP7.1 U6.6 U7.6
NetC95_2: C95.2 J5.10 J5.13 J5.14
NetC113_2: C113.2 J6.10 J6.13 J6.14
NetC131_2: C131.2 J7.10 J7.13 J7.14
NetC135_2: C135.2 U13.4
NetC144_1: C144.1 C145.2 L6.1 U14.4
NetC146_1: C146.1 C147.2 L7.1 U14.9
NetC148_2: C148.2 J8.6 J8.7 J8.8 J8.9 R152.1
NetC149_2: C149.2 U14.2 Y2.1
NetC150_2: C150.2 U14.3 Y2.3
NetD3_1: D3.1 U2.6
NetD3_2: D3.2 R66.2
NetD4_1: D4.1 U2.4
NetD4_2: D4.2 R67.2
NetD5_1: D5.1 U22.6
NetD5_2: D5.2 R120.1
NetD6_1: D6.1 U22.4
NetD6_2: D6.2 R122.2
NetD8_2: D8.2 R142.2
NetD9_1: D9.1 R147.2
NetD10_1: D10.1 R148.2
NetJ5_1: J5.1 R97.2
NetJ5_2: J5.2 R95.1 U9.17
NetJ5_11: J5.11 R94.1 U9.24
NetJ5_12: J5.12 R96.2
NetJ6_1: J6.1 R118.2
NetJ6_12: J6.12 R109.2
NetJ7_1: J7.1 R141.2
NetJ7_12: J7.12 R133.2
NetJ8_2: J8.2 U14.7 U15.5
NetJ8_3: J8.3 U14.8 U15.3
NetL1_1: L1.1 U8.6
NetL2_1: L2.1 U8.10
NetLED1_2: LED1.2 R47.1
NetR3_2: R3.2 U1.M16
NetR4_2: R4.2 U1.L16
NetR5_2: R5.2 U1.L17
NetR6_2: R6.2 U1.K17
NetR7_2: R7.2 U1.A17
NetR8_2: R8.2 U1.B16
NetR9_1: R9.1 S1.5
NetR9_2: R9.2 R37.1 U1.V1
NetR16_1: R16.1 S1.2
NetR16_2: R16.2 R38.1 U1.W5
NetR25_1: R25.1 S2.5
NetR25_2: R25.2 R39.1 U1.R1
NetR30_1: R30.1 S2.2
NetR30_2: R30.2 R40.1 U1.V5
NetR44_1: R44.1 U8.4
NetR48_1: R48.1 R49.2
NetR49_1: R49.1 R54.2 U8.5
NetR51_1: R51.1 R52.2 U8.2
NetR59_2: R59.2 U1.W15
NetR77_1: R77.1 U5.3
NetR78_1: R78.1 U5.8
NetR79_1: R79.1 S4.3
NetR80_2: R80.2 S4.4
NetR81_1: R81.1 U5.5
NetR82_1: R82.1 Y1.1
NetR83_1: R83.1 U5.7
NetR84_2: R84.2 R86.1 U5.2
NetR89_1: R89.1 U9.16
NetR103_1: R103.1 U10.27
NetR104_1: R104.1 U10.16
NetR108_1: R108.1 U10.8
NetR110_2: R110.2 U10.24
NetR116_2: R116.2 U10.29
NetR125_1: R125.1 U11.27
NetR126_1: R126.1 U11.29
NetR128_1: R128.1 U11.16
NetR131_1: R131.1 U11.8
NetR134_2: R134.2 U11.24
NetR144_2: R144.2 U14.24
NetR145_1: R145.1 U14.28
NetR146_1: R146.1 U14.32
NetR147_1: R147.1 U14.54
NetR148_1: R148.1 U14.55
NetR149_2: R149.2 R150.1 U16.4
NetR150_2: R150.2 U14.61 U16.3
NetR151_2: R151.2 U14.14
NetR153_2: R153.2 U14.60
NetR154_2: R154.2 U14.6
NetR155_2: R155.2 U14.36
NetR156_1: R156.1 S5.4 U21.1 U21.19
NetS1_3: S1.3 U3.6 U3.7
NetS1_6: S1.6 U3.1 U3.3
NetS2_3: S2.3 U3.15 U3.16
NetS2_6: S2.6 U3.10 U3.12
NetU14_40: U14.40 U14.41
NetU14_62: U14.62 U16.2
NetU14_63: U14.63 U16.1
P0_25MHZ_CLK: R73.2 R78.2
P0_PHY_CLK: R73.1 TP8.1 U10.23
P0_RD_N: J6.8 R106.1 U10.9
P0_RD_P: J6.7 R105.1 U10.10
P0_TD_N: J6.4 R99.1 U10.11
P0_TD_P: J6.3 R98.1 U10.12
P1_25MHZ_CLK: R76.2 R81.2
P1_PHY_CLK: R76.1 TP9.1 U11.23
P1_RD_N: J7.8 R130.1 U11.9
P1_RD_P: J7.7 R129.1 U11.10
P1_TD_N: J7.4 R121.1 U11.11
P1_TD_P: J7.3 R119.1 U11.12
RD_N: J5.8 R91.1 U9.9
RD_P: J5.7 R90.1 U9.10
TD_N: J5.4 R88.1 U9.11
TD_P: J5.3 R87.1 U9.12
VDD_1V2: C44.2 C45.2 C46.2 C47.2 C48.2 C49.2 C50.2 C72.2 J2.18 L5.2 R55.2 TP3.1 U1.E9 U1.E11 U1.F9 U1.F11 U1.G14 U1.G15 U1.J14 U1.J15 U1.K5 U1.K6 U1.P10 U1.P13 U1.R10 U1.R13 U7.3
VDD_3V3: C43.1 C55.2 C56.2 C57.2 C58.2 C59.2 C60.2 C61.2 C62.2 C63.2 C64.2 C65.2 C66.2 C67.2 C68.2 C69.2 C70.2 C73.1 C75.1 C77.1 C78.1 C79.1 C80.1 C81.1 C82.1 C83.1 C84.1 C85.1 C86.1 C87.1 C88.1 C89.2 C90.2 C91.2 C92.2 C93.1 C94.1 C96.1 C97.1 C98.1 C99.1 C100.1 C101.1 C102.1 C103.1 C104.1 C105.1 C106.2 C107.2 C108.1 C109.2 C110.2 C111.1 C112.1 C114.1 C115.1 C116.1 C117.1 C118.1 C119.1 C120.1 C121.1 C122.1 C123.1 C124.2 C125.2 C126.1 C127.2 C128.2 C129.1 C130.1 C152.1 C153.2 C155.1 C157.1 C159.1 J5.5 J5.6 J6.5 J6.6 J7.5 J7.6 L3.2 R1.2 R2.1 R66.1 R67.1 R68.2 R69.2 R70.2 R71.2 R74.1 R75.2 R84.1 R87.2 R88.2 R90.2 R91.2 R92.1 R93.2 R94.2 R95.2 R96.1 R97.1 R98.2 R99.2 R100.2 R101.2 R102.2 R103.2 R105.2 R106.2 R107.1 R108.2 R109.1 R110.1 R117.2 R118.1 R119.2 R120.2 R121.2 R122.1 R125.2 R126.2 R127.2 R129.2 R130.2 R131.2 R132.1 R133.1 R134.1 R140.2 R141.1 R156.2 TP2.1 U1.A9 U1.A18 U1.B1 U1.E7 U1.E10 U1.E13 U1.E16 U1.F4 U1.F7 U1.F10 U1.F13 U1.F16 U1.G4 U1.G5 U1.G6 U1.H5 U1.H6 U1.H16 U1.H17 U1.L14 U1.L15 U1.M1 U1.M5 U1.M6 U1.N14 U1.N15 U1.P9 U1.R9 U1.R11 U1.R12 U1.V19 U1.W8 U2.5 U5.6 U6.3 U6.4 U6.5 U7.4 U7.5 U9.14 U9.21 U10.14 U10.21 U11.14 U11.21 U12.8 U17.8 U18.5 U19.1 U20.8 U21.20 U218.8 Y1.4
VDDA_3V3: C25.2 C30.1 C31.1 C51.2 C52.2 C54.1 L4.2 S1.1 S1.4 S2.1 S2.4 U1.P6 U1.R6 U3.4 U4.2
pads on no net: J1. J1.13 J1.16 J1.29 J1.32 J1.41 J1.43 J1.44 J1.66 J2. J2.13 J2.14 J2.15 J2.16 J2.17 J2.36 J2.71 J2.72 J2.73 J2.74 J2.75 J2.76 J2.77 J2.81 J2.82 J2.83 J2.84 J2.85 J2.86 J2.87 J2.88 J2.89 J2.90 J2.91 J2.92 J2.93 J2.94 J2.95 J2.96 J2.97 J2.98 J2.99 J2.100 J3.9 J5.9 J5.ALIGN1 J5.ALIGN2 J6.9 J6.ALIGN1 J6.ALIGN2 J7.9 J7.ALIGN1 J7.ALIGN2 J8.4 J8.ALIGN1 J8.ALIGN2 J9.1 J9.2 J9.3 J9.4 J9.5 J9.6 J9.7 J9.8 J9.9 J9.10 J10.1 J10.2 J10.3 J10.4 J10.5 J10.6 J10.7 J10.8 J10.9 J10.10 U1.H4 U1.J18 U1.J19 U1.V13 U1.W12 U3.8 U3.9 U4.1 U4.3 U4.7 U4.8 U8.V U9.13 U9.15 U9.22 U9.33@6365,3342.13 U9.33@6365,3400 U9.33@6422.87,3342.13 U9.33@6422.87,3400 U10.13 U10.15 U10.22 U10.33@5481.06,3366.06 U10.33@5481.06,3423.94 U10.33@5538.94,3366.06 U10.33@5538.94,3423.94 U11.13 U11.15 U11.22 U11.33@4472.13,3360 U11.33@4472.13,3417.87 U11.33@4530,3360 U11.33@4530,3417.87 U14.22 U14.23 U14.26 U14.27 U14.29 U14.30 U14.33 U14.34 U14.43 U14.44 U14.45 U14.46 U14.48 U14.52 U14.53 U14.57 U14.58 U14.59 U15.2 U16.7 U18.1 U18.3 U18.4 U18.6 U20.6 U21.3 U21.5 U21.7 U22.2 U22.5

## Silkscreen, mask and mechanical layers (free items; w line width, h text height)
M1 Board Outline:
  lines w10: 2580,4845 7080,4845 7080,1645 2582.29,1647.29 2580,4845
M2 Board Dimensions:
  rectangle: 2705,5460 3080,5585
  rectangle: 2580,5585 2705,5710
  lines w7: 2580,5585 3580,5585 ; 2705,5460 2705,5710 ; 2830,5460 2830,5710 ; 3080,5460 3080,5710 ; 3330,5460 3330,5710 ; 2580,5460 3580,5460 3580,5710 2580,5710 2580,5460
M9 Title Sheet:
  lines w10: 10895,1005 10995,1005 ; 10995,8975 10995,8995 ; 1005,1005 1005,12095 16495,12095 16495,1005 1005,1005 ; 1205,1205 16295,1205 16295,11895 1205,11895 1205,1205
M11 gerber information:
  lines w10: 1204.5,1206.67 3672.83,1206.67 ; 1204.5,1410 3674.5,1410 3674.5,1208.33 ; 1205,1206.67 1205,1410
  text "LAYER NAME =" at 1268,1278.34 h60

## Dimensions
2580,5460 to 3580,5460 on M2 Board Dimensions
2580,4860 to 7080,4845 on M2 Board Dimensions
2580,1645 to 2565,4845 on M2 Board Dimensions

## Text inside footprints (layer, text, board x,y; h text height)
L3: Mechanical 6 "Land Pattern Adapted for Flow Soldering" at 5083.86,2671.77 h1.97
L4: Mechanical 6 "Land Pattern Adapted for Flow Soldering" at 4656.34,2176.77 h1.97
L5: Mechanical 6 "Land Pattern Adapted for Flow Soldering" at 5098.11,2987.52 h1.97 r270
S4: Mechanical 5 "1" at 10872.76,3090.51 h39.37
S5: Mechanical 5 "1" at 12057.76,8615.51 h39.37
U1: Top Overlay "Designator195" at 4109.49,2993.15 h50; Top Overlay "RefDes" at 4377.48,2623.5 h50
U8: Bottom Overlay "Designator355" at 6146,2163.4 h50; Bottom Overlay "RefDes" at 6160,2042.4 h50